# EAGLE board d11c_serial (EAGLE 9.5.2)
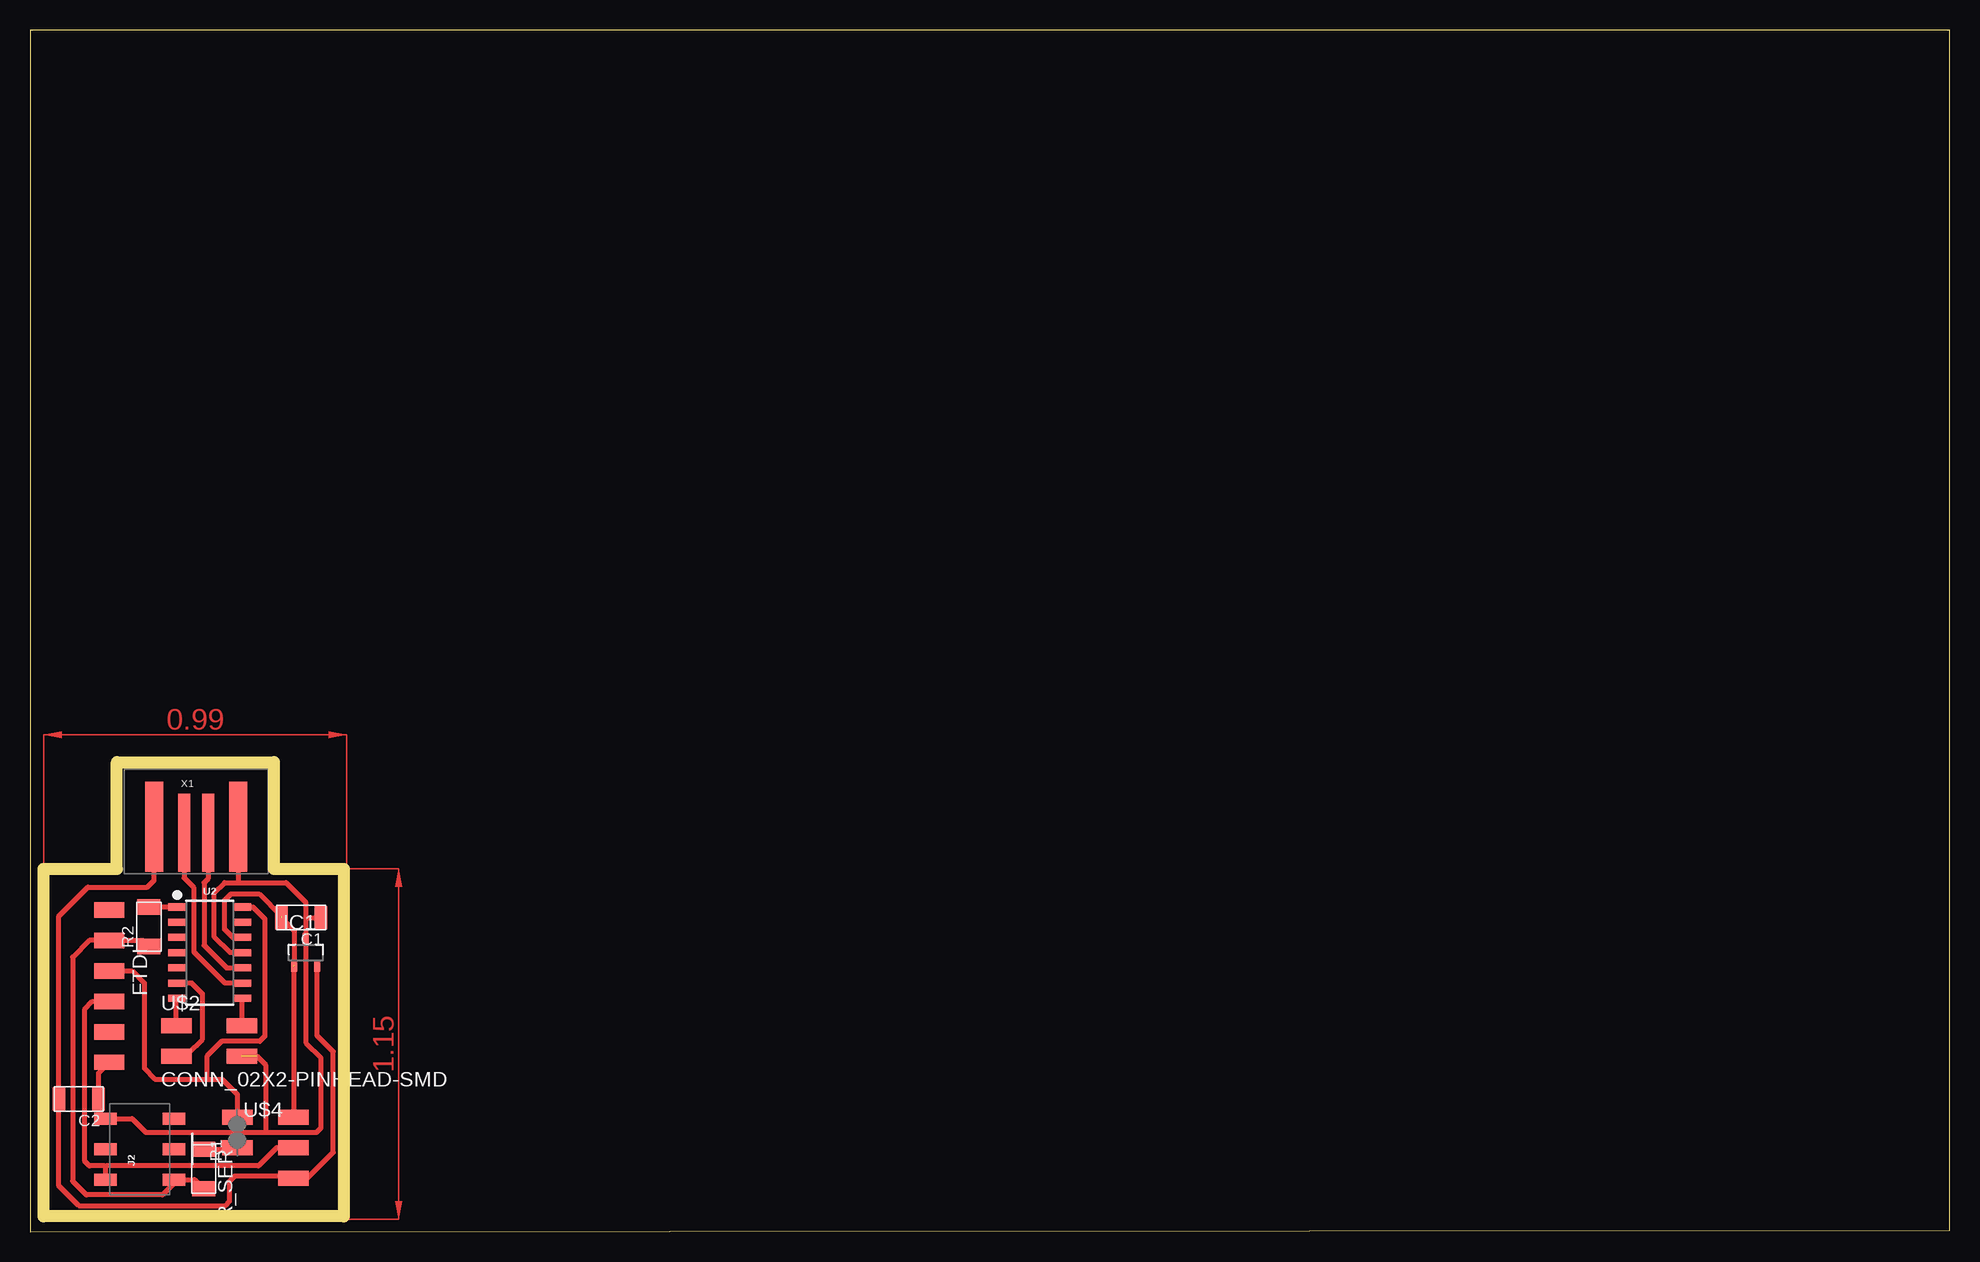
[diagram p0: board, top side]

Size 160 x 100.13 mm. Coordinates in mm from the lower left corner, seen from the top.
Outline: 0,0 160,0.13 160,100.13 0,100.13 0,0
Copper layers (1*16): Top 0.035mm / dielectric 1.5mm / Bottom 0.035mm
Design rules "default *": minimum track width 16mil, minimum drill 0.35mm, track to track 16mil, track to pad 16mil, pad to pad 16mil, via to via 8mil, smd to smd 6mil, copper to edge 40mil, drill to drill 6mil, minimum pad ring 10mil, minimum via ring 8mil, stop-mask expansion 4mil, vias tented up to drill 0mil, thermal gap 10mil
Milling: 8 lines

## Footprints (pad centres in the part's own frame; a part is rotated, then mirrored left to right if it is on the bottom)
C1206FAB = smd 1.016 x 1.905: 1 -1.651,0; 2 1.651,0
1X06SMD = smd 2.54 x 1.27: 1 0,6.35; 2 0,3.81; 3 0,1.27; 4 0,-1.27; 5 0,-3.81; 6 0,-6.35
SOT23 = smd 0.508 x 1.016: 1 -0.95,-1.1; 2 0.95,-1.1; 3 0,1.1
PDI_2X3_SMD = smd 1.02 x 1.9: 1 -2.54,-2.85; 2 -2.54,2.85; 3 0,-2.85; 4 0,2.85; 5 2.54,-2.85; 6 2.54,2.85
SJFAB = smd 1.27 x 2.54: 1 -0.635,0; 2 1.905,0
R1206FAB = smd 1.27 x 1.905: 1 -1.651,0; 2 1.651,0
SOIC-14 = smd 0.6 x 1.5: 1 -3.81,-2.7; 2 -2.54,-2.7; 3 -1.27,-2.7; 4 0,-2.7; 5 1.27,-2.7; 6 2.54,-2.7; 7 3.81,-2.7; 8 3.81,2.7; 9 2.54,2.7; 10 1.27,2.7; 11 0,2.7; 12 -1.27,2.7; 13 -2.54,2.7; 14 -3.81,2.7
2X02SMD = smd 2.54 x 1.27: 1 -2.54,1.27; 2 2.92,1.27; 3 -2.54,-1.27; 4 2.92,-1.27
SPDTSWITCH = smd 2.54 x 1.27: 1 0.38,2.54; 2 0.38,0; 3 0.38,-2.54
USB-A-PCB = smd 7.5 x 1.5: 5V -0.2,-3.5; GND -0.2,3.5 | smd 6.5 x 1: USB_M 0.3,-1; USB_P 0.3,1

## Placement (x,y rotation side)
C1  [C1206FAB]  22.61,26.16 180 top
C2  [C1206FAB]  4.06,11.05 180 top
FTDI  CONN_06_FTDI-SMD-HEADER  [1X06SMD]  6.6,20.45 180 top
IC1  [SOT23]  22.99,23.24 0 top
J2  [PDI_2X3_SMD]  9.14,6.86 90 top
R1  SW_SOLDER_JUMPER  [SJFAB]  17.27,7.62 90 top
R2  [R1206FAB]  9.91,25.4 90 top
R_SER  [R1206FAB]  14.48,5.21 270 top
U2  ATSAMD11C14  [SOIC-14]  14.99,23.24 270 top
U$2  CONN_02X2-PINHEAD-SMD  [2X02SMD]  14.73,15.88 0 top
U$4  SW_SPDTSWITCH  [SPDTSWITCH]  21.59,6.98 0 top
X1  CONN_USBPCB  [USB-A-PCB]  13.84,33.53 270 top

## Library data of the parts
C1 C2 = fab; C: 1µF
FTDI IC1 R1 U$2 U$4 X1 = fab
J2 = fab; PROD_ID: CONN-11290
R2 = fab; R: 1.2k
R_SER = fab; R: 4.7k
U2 = SAMD11C_Mini_Breakout

## Nets
CLK: U2.7 U$2.1
DIO: U2.8 U$2.2
GND: C1.1 C2.1 FTDI.1 IC1.3 J2.6 U2.11 U$2.4 X1.GND
N$1: R1.1 R_SER.1
N$2: U2.9 X1.USB_M
N$3: U2.10 X1.USB_P
N$4: C2.2 IC1.2 U$4.3 X1.5V
N$5: FTDI.5 J2.1 R2.1 R_SER.2
N$6: FTDI.4 R1.2 U2.14
N$8: C1.2 IC1.1 U2.12 U$4.1
N$9: FTDI.3 J2.2 U$4.2
N$10: R2.2 U2.1
RES: U2.6 U$2.3

## Tracks (layer width: path | path; a pad name or v marks a point on that pad's centre or on a via)
CLK
  Top 0.406: U$2.1 12.19,19.34 U2.7
DIO
  Top 0.406: U$2.2 17.69,17.18 U2.8
GND  (1 unrouted)
  Top 0.406: U2.11 16.67,23.24 15.37,24.54 15.37,28.23 16.23,29.08 17.4,29.08 | 17.4,29.08 21.34,29.08 22.99,27.43 22.99,26.04 | 18.92,14.61 19.68,13.84 19.68,8.26 | 19.68,8.26 23.88,8.26 24.26,8.64 24.26,14.48 22.99,15.75 IC1.3 22.99,26.04 | 22.99,26.04 23.11,26.16 C1.1 | 19.68,8.26 9.65,8.26 8.51,9.4 J2.6 5.71,9.98 C2.1 5.71,13.21 FTDI.1 | 17.4,29.08 17.4,33.67 X1.GND
N$1
  Top 0.406: R_SER.1 17.14,6.86 R1.1
N$2
  Top 0.406: X1.USB_M 12.84,29.46 13.67,28.63 13.67,23.29 16.26,20.7 U2.9
N$3
  Top 0.406: U2.10 16.38,21.97 14.51,23.84 14.51,29.08 14.84,29.41 X1.USB_P
N$4
  Top 0.406: X1.5V 10.34,29.27 9.78,28.7 4.83,28.7 2.41,26.29 C2.2 2.41,3.81 4.06,2.16 16.29,2.16 16.64,2.5 16.64,4.19 17.09,4.64 21.97,4.64 U$4.3 23.11,4.44 25.27,6.6 25.27,14.99 23.94,16.32 IC1.2
N$5
  Top 0.406: R2.1 9.4,24.26 FTDI.5 4.95,24.26 3.56,22.86 3.56,4.19 4.7,3.05 11.05,3.05 11.99,3.99 J2.1 13.72,4.32 R_SER.2
N$6
  Top 0.406: U2.14 18.57,27.05 19.57,26.06 19.57,16.27 19.15,15.85 15.98,15.85 14.73,14.61 14.73,12.7 | FTDI.4 8.51,21.72 9.53,20.7 9.53,13.59 10.41,12.7 14.73,12.7 | R1.2 17.27,11.43 16,12.7 14.73,12.7
N$8  (2 unrouted)
  Top 0.406: C1.2 22.04,25.08 IC1.1 | 21.97,22.07 U$4.1 | 18.19,24.51 U2.12 16.89,24.51 16.23,25.18 16.23,27.6 16.76,28.14 19.1,28.14 20.95,26.29
N$9
  Top 0.406: U$4.2 20.57,6.98 19.05,5.46 6.35,5.46 6.29,5.4 | J2.2 6.29,5.4 | 6.29,5.4 6.24,5.46 4.95,5.46 4.57,5.84 4.57,18.54 5.21,19.18 FTDI.3
N$10
  Top 0.406: R2.2 U2.1
RES
  Top 0.406: U2.6 13.48,20.7 14.38,19.79 14.38,16.03 13.21,14.86 12.45,14.86 U$2.3
(copper drawn outside any net)
  shapes: Top area x2